# Altium PCB MainPCB.PcbDoc
Units mil, origin at the board's own origin, x right, y up, seen from the top; angles counter-clockwise.
Board outline 4940.02 x 2690.03 mil, 2 copper layers (Top Layer, Bottom Layer); 43 components, 48 nets, 197 pads, 3 vias.
Unrouted connection lines stored in the file: 1.
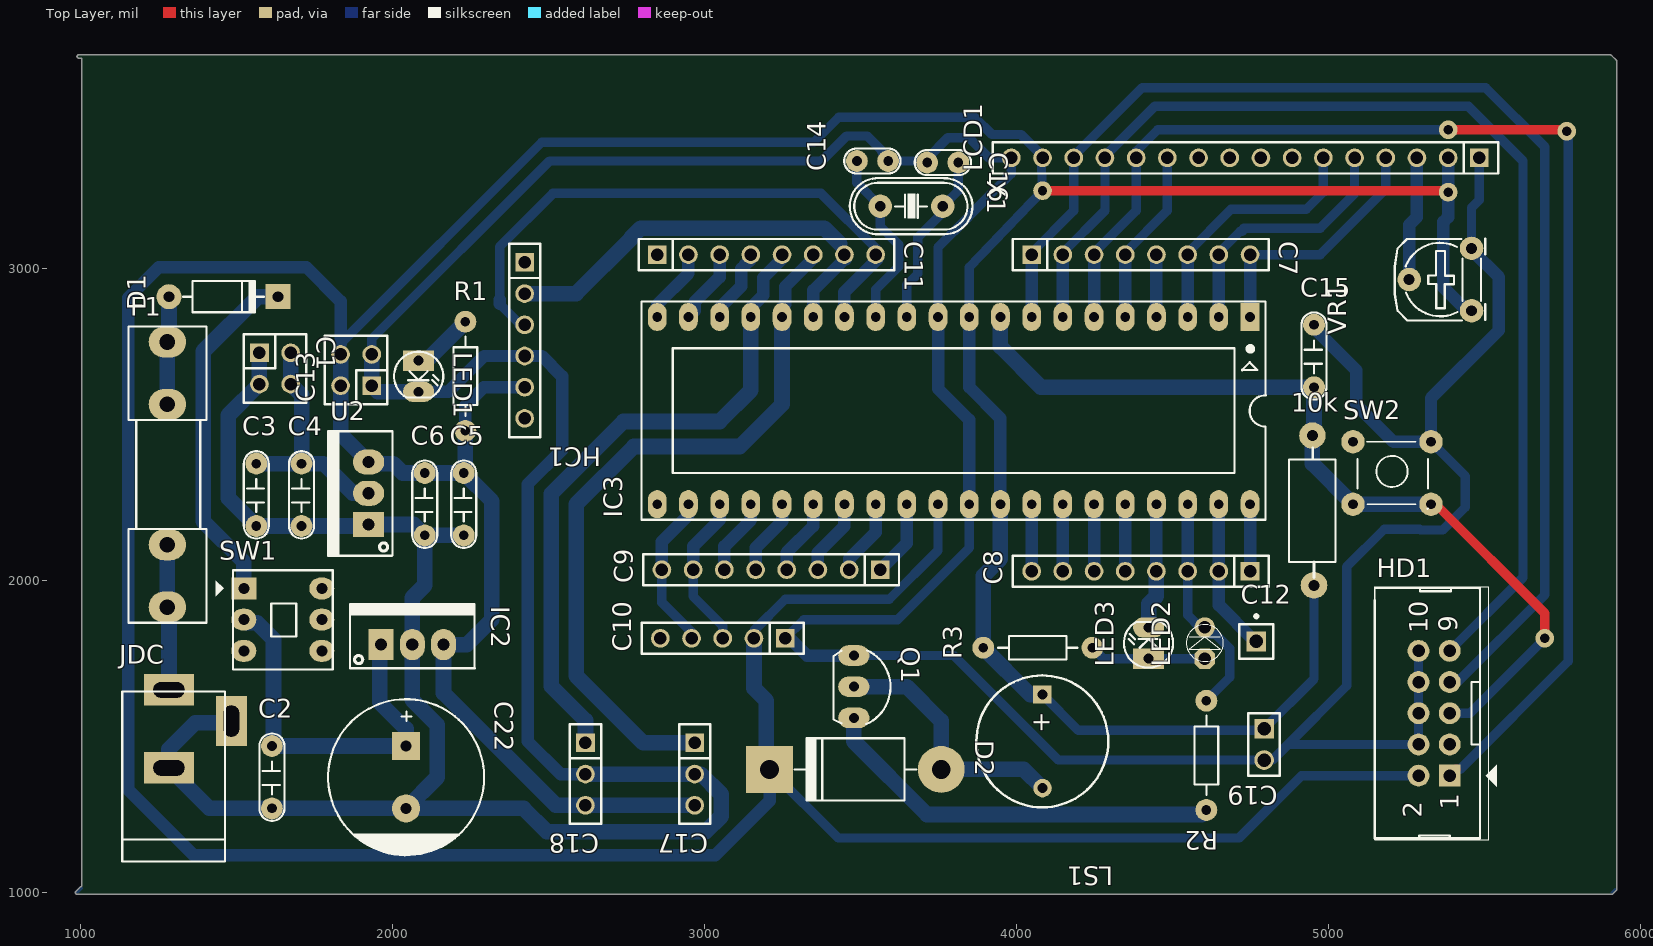
[diagram p0: Top Layer view]
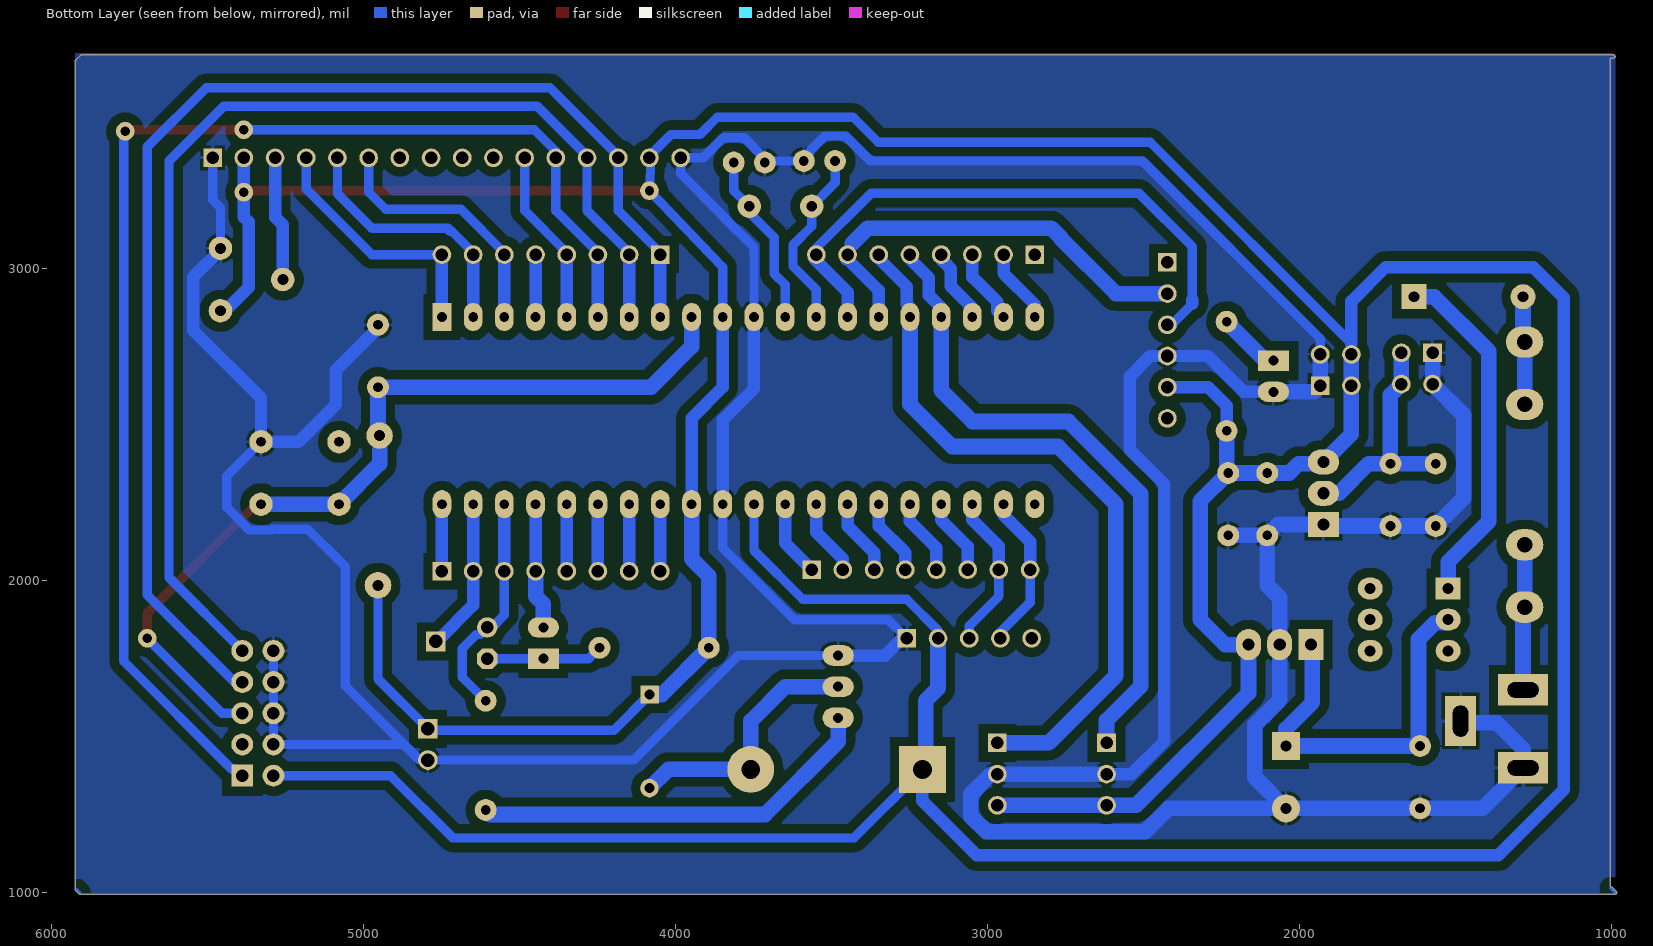
[diagram p1: Bottom Layer view, seen from below]
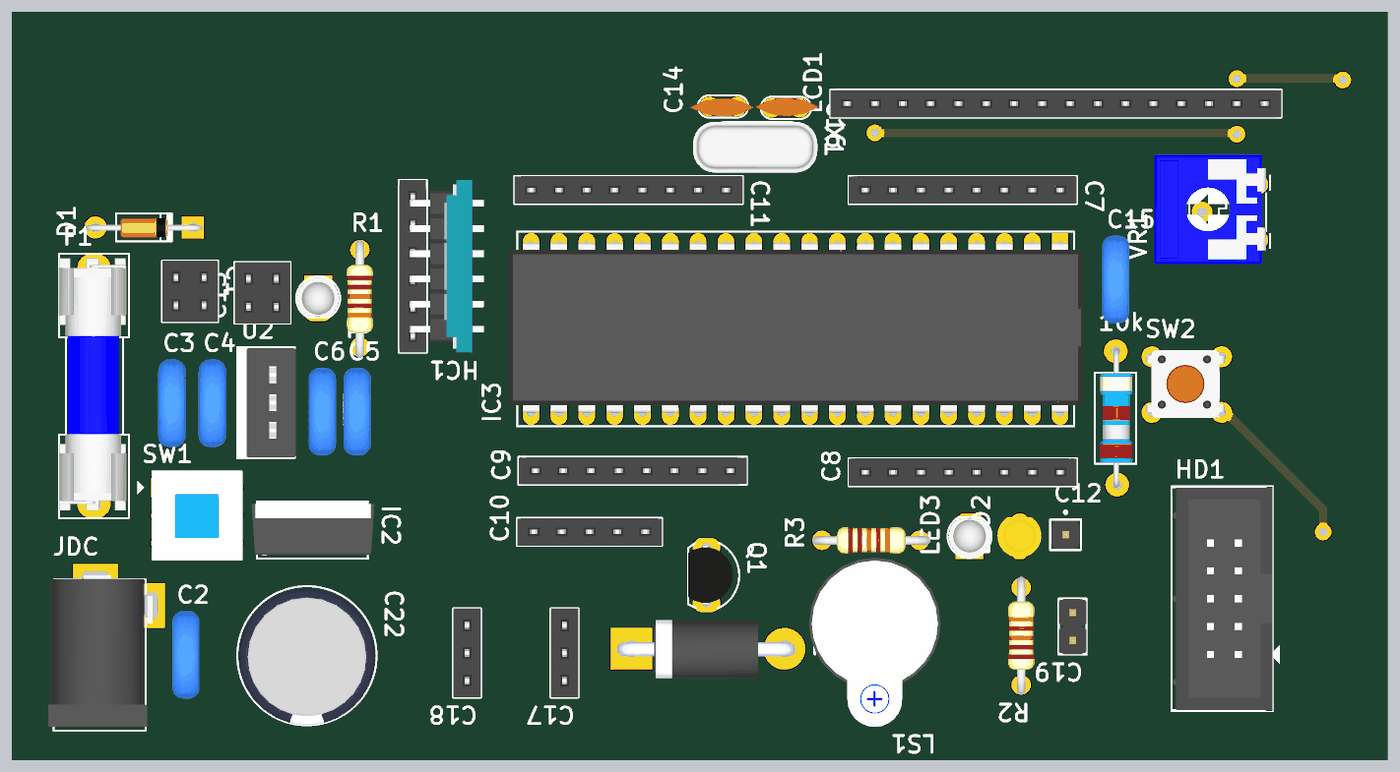
[diagram p2: 3D render of the assembled board from above, using the file's embedded part models]

## Layer stack, top to bottom
Top Solder: solder mask 0.4, Solder Resist, Dk 3.5
Top Layer: signal copper 1.4
Dielectric 1: dielectric 12.6, FR-4, Dk 4.8
Bottom Layer: signal copper 1.4
Bottom Solder: solder mask 0.4, Solder Resist, Dk 3.5

## Board outline
990,994.99 cw(c990,1000) 986.47,1003.56 986.45,1003.55 1001.45,1018.55 cw(c1005,1015) 1004.99,1020.01 1004.99,3674.99 995,3674.99 cw(c995,3680) 995,3685.01 5905,3685.01 cw(c5905,3680) 5908.56,3683.53 5908.55,3683.55 5923.55,3668.55 5923.53,3668.56 cw(c5920,3665) 5925.02,3665 5925.02,1010 cw(c5920,1010) 5923.53,1006.44 5923.55,1006.45 5913.55,996.45 5913.56,996.47 cw(c5910,1000) 5910,994.99

## Design rules (kind name [scope] priority, off if disabled: settings)
Clearance [All] p1: gap=30
PlaneConnect [All] p1: planeconnectstyle=Relief reliefexpansion=30 reliefentries=4 reliefconductorwidth=30 reliefairgap=30
PolygonConnect [All] p1: connectstyle=Relief reliefconductorwidth=10 reliefentries=4 polygonreliefangle="90 Angle" airgapwidth=10
RoutingCorners [All] p1: cornerstyle=45-Degree minsetback=30 maxsetback=90
RoutingVias [All] p1: holewidth=30 width=60 viastyle="Through Hole" minholewidth=30 minwidth=60 maxholewidth=40 maxwidth=70
SolderMaskExpansion [All] p1: expansion=4
Width [All] p1: maxlimit=50 minlimit=30 preferedwidth=40
28 further rules are at their usual default settings.

## Classes and differential pairs
component class Test: 10k C1 C3 C4 C5 C6 C7 C8 C9 C10 C11 C12 C13 C14 C15 C16 C17 C18 C19 C22 D1 D2 F1 HC1 HD1 IC2 IC3 JDC LED1 LED2 LED3 LS1 Q1 R1 R2 R3 SW1 SW2 U2 X1

## Components (designator, comment, footprint, x,y, rotation, side; value= is the part's Value field where it differs from the comment)
10k "Res" RES-1/2W 4950,2205 r90 top
C1 "JP2x2" JP2-C2T 1625,2680 r270 top
C2 "104" CN2 1615,1270 r90 top
C3 "106" CN2 1565,2175 r90 top
C4 "104" CN2 1710,2175 r90 top
C5 "104" CN2 2230,2145 r90 top
C6 "106" CN2 2105,2145 r90 top
C7 "JP8" JP8-C1T 4050,3045 r0 top
C8 "JP8" JP8-C1T 4750,2030 r180 top
C9 "JP8" JP8-C1T 3565,2035 r180 top
C10 "JP5" JP5-C1T 3260,1815 r180 top
C11 "JP8" JP8-C1T 2850,3045 r0 top
C12 "JP1" JP1-D1T 4770,1805 r0 top
C13 "JP2x2" JP2-C2T 1885,2675 r90 top
C14 "22pF" CN1 3590,3345 r180 top
C15 "104" CN2 4955,2620 r90 top
C16 "22pF" CN1 3715,3340 r0 top
C17 "JP3" JP3-C1T 2970,1480 r270 top
C18 "JP3" JP3-C1T 2620,1480 r270 top
C19 "JP2" JP2-D1T 4795,1525 r270 top
C22 "Cap Pol3" CP2/5 2045,1470 r270 top
D1 "1N4007" D1A 1285,2910 r180 top
D2 "1N5819" D5A 3210,1395 r0 top
F1 "F1A" Fuse 1280,2340 r90 top
HC1 "HC06" HC06 2425,2775 r270 top
HD1 "IDC 5x2" IDC10 5335,1575 r90 top
IC2 "LM7805" QTO-220 1965,1795 r0 top
IC3 "ATMEL 16L" DIP40/W0.6 4750,2845 r180 top
JDC "Jac DC" DC-IN 1385,1525 r90 top
LCD1 "LCD 16x2A" JP16-C1T 5485,3355 r180 top
LED1 "LED" LED-3 2085,2705 r270 top
LED2 "LED" LED-3MM-YELLOW 4605,1750 r90 top
LED3 "LED" LED-3 4425,1750 r90 top
LS1 "Speaker" SPEAKER 4084.5,1635 r270 top
Q1 "C1815" QTO-92 3480,1660 r270 top
R1 "1k" R1/4W 2235,2480 r90 top
R2 "1k" R1/4W 4610,1615 r270 top
R3 "1k" R1/4W 4245,1785 r180 top
SW1 "SW6S" SW6 1525,1975 r0 top
SW2 "SW" SW2-DIP 5080,2445 r0 top
U2 "LM1117-3.3V" TO220-123 1925,2180 r90 top
VR1 "10K" VR 5460,2865 r90 top
X1 "16Mhz" XT2 3665,3200 r0 top

## Footprints (in the part's own frame and the unit in brackets; to place one, negate y for a bottom-side part, rotate by r counter-clockwise, add the part's x,y. Pads: shape width x height; smd on the part's side, far side on the other; paste and mask are expansions set on the pad)
CN1 [mil]
  round 70 hole 31: 1(0,0) 2(100,0)
  silkscreen extent -40,-40 141,40, body extent -60,-30 170,37, height 265
CN2 [mil]
  round 70 hole 31: 1(0,0) 2(200,0)
  silkscreen extent -40,-40 240,40, body extent -54,-44 260,55, height 407
CP2/5 [mil] "Tu hoa 1000uF/25V,50V"
  rect 90x90 hole 35: 1(0,0)
  round 90 hole 35: 2(200,0)
  silkscreen extent -150,-250 350,250, body extent -142,-246 350,246, height 984
D1A [mil] "Diode 1A, W 100mil, L 350mil"
  round 80 hole 35: 1(0,0)
  rect 80x80 hole 35: 2(-350,0)
  silkscreen extent -305,-50 -45,50, body extent -386,-33 34,36, height 84
D5A [mil] "Diode 5A, W 200mil, L 550mil"
  round 150 hole 60: 1(550,0)
  rect 150x150 hole 60: 2(0,0)
  silkscreen extent 80,-100 470,100, body extent -52,-106 590,103, height 254
DC-IN [mil] "Jac DC input"
  rect 100x160 hole 50 slot 100 at 90 deg: 1(125,100) 2(-125,100)
  rect 160x100 hole 50 slot 100 at 0 deg: 3(25,-100)
  silkscreen extent -425,-80 120,250, body extent -410,-105 134,269, height 434
DIP40/W0.6 [mil] "40 PIN, W 600mil, Pin to pin 100mil"
  rect 60x90 hole 31: 1(0,0)
  oval 60x90 hole 31: 2(100,0) 3(200,0) 4(300,0) 5(400,0) 6(500,0) 7(600,0) 8(700,0) 9(800,0) 10(900,0) 11(1000,0) 12(1100,0) 13(1200,0) 14(1300,0) 15(1400,0) 16(1500,0) 17(1600,0) 18(1700,0) 19(1800,0) 20(1900,0) 21(1900,600) 22(1800,600) 23(1700,600) 24(1600,600) 25(1500,600) 26(1400,600) 27(1300,600) 28(1200,600) 29(1100,600) 30(1000,600) 31(900,600) 32(800,600) 33(700,600) 34(600,600) 35(500,600) 36(400,600) 37(300,600) 38(200,600) 39(100,600) 40(0,600)
  silkscreen extent -50,-50 1950,650, body extent -82,-10 1982,600, height 224
Fuse [mil] "De Fuse"
  oval 100x120 hole 50: 1(-425,0) 1(-225,0) 2(225,0) 2(425,0)
  silkscreen extent -475,-125 475,125, body extent -448,-117 459,127, height 378
HC06 [mm]
  rect 1.52x1.52 hole 1.02: 1(-6.223,0)
  round 1.52 hole 1.02: 2(-3.683,0) 3(-1.143,0) 4(1.397,0) 5(3.937,0) 6(6.477,0)
  silkscreen extent -7.74,-1.27 8,1.27, body extent -7.74,-1.25 8,6.48, height 46
IDC10 [mil]
  rect 70x70 hole 40: 1(-200,-55)
  round 70 hole 40: 2(-200,45) 3(-100,-55) 4(-100,45) 5(0,-55) 6(0,45) 7(100,-55) 8(100,45) 9(200,-55) 10(200,45)
  silkscreen extent -405,-205 405,186, body extent -400,-178 400,180, height 366
JP1-D1T [mm] "1pins, 1 row, straight, gold plating"
  rect 1.6x1.6 hole 1.1: 1(0,0)
  silkscreen extent -1.4,-1.4 1.4,2.17, body extent -1.27,-1.27 1.27,1.27, height 8.54
JP2-C2T [mm] "4 pins, dual row, straight, gold plating"
  rect 1.52x1.52 hole 1.02: 1(-1.27,-1.27)
  round 1.52 hole 1.02: 2(1.27,-1.27) 3(1.27,1.27) 4(-1.27,1.27)
  silkscreen extent -2.79,-2.54 2.79,2.54, body extent -2.79,-2.54 2.79,2.54, height 8.51
JP2-D1T [mm] "2 pins, 1 row, straight, gold plating"
  rect 1.6x1.6 hole 1.1: 1(0,0)
  round 1.6 hole 1.1: 2(2.54,0)
  silkscreen extent -1.27,-1.27 3.81,1.27, body extent -1.27,-1.27 3.81,1.27, height 8.54
JP3-C1T [mm] "3 row, straight, gold plating"
  rect 1.52x1.52 hole 1.02: 1(0,0)
  round 1.52 hole 1.02: 2(2.54,0) 3(5.08,0)
  silkscreen extent -1.52,-1.27 6.6,1.27, body extent -1.52,-1.25 6.6,1.25, height 8.51
JP5-C1T [mm] "5 row, straight, gold plating"
  rect 1.52x1.52 hole 1.02: 1(0,0)
  round 1.52 hole 1.02: 2(2.54,0) 3(5.08,0) 4(7.62,0) 5(10.16,0)
  silkscreen extent -1.52,-1.27 11.68,1.27, body extent -1.52,-1.25 11.68,1.25, height 8.51
JP8-C1T [mm] "8 row, straight, gold plating"
  rect 1.52x1.52 hole 1.02: 1(0,0)
  round 1.52 hole 1.02: 2(2.54,0) 3(5.08,0) 4(7.62,0) 5(10.16,0) 6(12.7,0) 7(15.24,0) 8(17.78,0)
  silkscreen extent -1.52,-1.27 19.3,1.27, body extent -1.52,-1.25 19.3,1.25, height 8.51
JP16-C1T [mm] "16 row, straight, gold plating"
  rect 1.52x1.52 hole 1.02: 1(0,0)
  round 1.52 hole 1.02: 2(2.54,0) 3(5.08,0) 4(7.62,0) 5(10.16,0) 6(12.7,0) 7(15.24,0) 8(17.78,0) 9(20.32,0) 10(22.86,0) 11(25.4,0) 12(27.94,0) 13(30.48,0) 14(33.02,0) 15(35.56,0) 16(38.1,0)
  silkscreen extent -1.52,-1.27 39.62,1.27, body extent -1.52,-1.25 39.62,1.25, height 8.51
LED-3 [mil] "LED 2 PIN, 3ly Only colour"
  rect 65x100 hole 32: 1(0,0)
  oval 65x100 hole 32: 2(100,0)
  silkscreen extent -29,-78 118,79, body extent -25,-75 113,75, height 217
LED-3MM-YELLOW [mil]
  oct 65x65 hole 40: 1(0,0)
  round 65 hole 40: 2(100,0)
  silkscreen extent -9,-59 109,59, body extent -27,-77 117,80, height 181
QTO-92 [mil] "TO-92"
  oval 66x100 hole 32: 1(-100,0) 2(0,0) 3(100,0)
  silkscreen extent -117,-65 120,118, body extent -109,-66 109,95, height 245
QTO-220 [mil] "TO-220 - 1-2-3"
  rect 80x100 hole 39: 1(0,0)
  oval 80x100 hole 39: 2(100,0) 3(200,0)
  silkscreen extent -100,-76 300,130, body extent -119,-64 322,121, height 755
R1/4W [mil] "R 1/4W, 2 Pin, 350mil"
  round 70 hole 31: 1(0,0) 2(350,0)
  silkscreen extent 48,-38 302,38, body extent -40,-47 386,47, height 111
RES-1/2W [mil]
  round 85 hole 35: 1(-220,-5) 2(260,0)
  silkscreen extent -195,-74 221,75, body extent -230,-60 270,56, height 121
SPEAKER [mm]
  rect 1.5x1.5 hole 0.8: 1(0,0)
  round 1.5 hole 0.8: 2(7.62,0.013)
  silkscreen extent -1.55,-5.38 9.18,5.36, body extent -2.22,-6 13.24,6, height 4.5
SW2-DIP [mil] "SW button 4pin, 250 x250 mil"
  round 75 hole 31: 1(0,0) 2(0,-200) 3(250,-200) 4(250,0)
  silkscreen extent 15,-215 240,0, body extent -36,-220 276,24, height 276
SW6 [mil] "SW DTDP - 6Pin 260x300x300 mil"
  rect 80x70 hole 35: 1(0,0)
  oval 80x70 hole 35: 2(0,-100) 3(0,-200) 4(250,-200) 5(250,-100) 6(250,0)
  silkscreen extent -90,-260 285,58, body extent -33,-259 281,55, height 532
TO220-123 [mil] "TO-220 - 1-2-3"
  rect 80x100 hole 39: 1(0,0)
  oval 80x100 hole 39: 2(100,0) 3(200,0)
  silkscreen extent -100,-76 300,130, body extent -95,-80 295,97, height 323
VR [mil] "Resistor Variable"
  round 75 hole 35: 1(0,0) 2(100,200) 3(200,0)
  silkscreen extent -31,-44 231,246, body extent -87,-30 307,372, height 165
XT2 [mil] "Footpin for Crystal 2 pin"
  round 75 hole 34: 1(-100,0) 2(100,0)
  silkscreen extent -198,-90 195,90, body extent -233,-93 213,90, height 138

## Part data
C1 C13: "WR-PHD 2.54 mm Dual Socket Header"
C2 C3 C4 C5 C6 C15: library part CN2, "Cap np 104 => 105pF"
C7 C8 C9 C10 C11 C12 C17 C18 C19: "WR-PHD 2.54 mm Angled Socket Header"
C14 C16: library part CN1, "Cap np  1pF - 472pF"
C22: "Polarized Capacitor (Surface Mount)"
D1: library part D1A, "Diode 1A"
D2: library part D5A, "Diode 5A"
F1: library part Fuse, "Fuse"
HD1: library part "IDC 5X2"
IC2: library part LM78xx, "On ap +, from + 5 to + 24VDC"
IC3: library part Atmega16L, "8-Bit AVR Microcontroller with 16K Bytes of In-System Programmable Flash Memory"
JDC: library part DCIN, "Jac DC input"
LCD1: library part LCD16x2A, "LCD dipslay 16 char, 2 line"
LED1 LED2 LED3: "LED Single colour Green and Red"
LS1: "Loudspeaker"
Q1: "NPN 600mW, ECB"
R1 R2 R3: library part R1/4W, "Resistor 1/4W"
SW1: "SW-DTDP - 6 Pin"
SW2: library part SW4, "Switch button 4 pin"
U2: library part LM1117, "800mA Low-Dropout Linear Regulator"
VR1: library part VR, "Var Resistor"
X1: library part XT2, "Crystal For all Crystal 2pin."

## Free pads (board coordinates)
  round 60 hole 30: 3(4085,3250) 4(5385,3245)

## Via types
v1: diameter 60, hole 30, Top Layer to Bottom Layer, 3 vias

## Nets (pads, with @x,y where several pads share a name; then routed paths per layer and width w, separated by ;. In a path a pad name is that pad's centre, name@x,y a point inside that pad or via, vN(x,y) a via of type N, cw(c..) or ccw(c..) an arc to the next point about the centre after c; other vN are vias at no path point)
3.3V: C1.3 C1.4 C3.2 C4.2 U2.2 | length 768.8
  Bottom Layer w50: C3.2 C4.2 ; C1.4 C1.3 1710,2595 C4.2 ; U2.2 1875,2280 1780,2375 C4.2
DS: C10.5
GND: C1.1 C1.2 C2.1 C3.1 C4.1 C5.1 C6.1 C10.1 C13.1 C13.2 C14.1 C15.2 C16.1 C17.2 C18.2 C19.2 C22.2 HC1.4 HD1.4 HD1.6 HD1.8 HD1.10 IC2.2 IC3.11 IC3.31 JDC.2 JDC.3 LCD1.1 LCD1.16 LED1.2 Q1.1 SW2.4 U2.1 VR1.3 | length 17348.5
  Bottom Layer w30: C13.2 1935,2775 2505,3345 3376.86,3345 3456.86,3425 3523.14,3425 3570,3378.14 3570,3375 C14.1@3600,3345 ; C10.1 3320,1875 3620,1875 3850,2105 IC3.31 ; Q1.1 3800,1760 4135,1425 C19.2 4821.63,1425 4871.63,1475 ; C14.1 C14.1@3600,3345 ; IC3.11 3750,3068.33 3847.5,3165.83 3847.5,3167.21 3985,3304.71 LCD1.16 3913.14,3355 3848.14,3420 3781.86,3420 3716.86,3355 3730,3355 C16.1 3710,3345 C14.1@3600,3345 ; HD1.10 HD1.8 HD1.6 HD1.4 4871.63,1475 ; SW2.4 5440,2335 5440,2235 5367.5,2162.5 5295.83,2162.5 5293.33,2165 5180,2165 5060,2045 5060,1663.37 4871.63,1475 ; VR1.3@5460,3060 VR1.3 5460,3195 5485,3220 LCD1.1
  Bottom Layer w40: LED1.2 2180,2605 2295,2720 HC1.4 2480,2720 2545,2655 2545,2419.2 2435,2309.2 2435,1485 2540,1380 C18.2 ; C10.1 3275,1815 3330,1760 Q1.1 ; IC3.11 3750,2615 3850,2515 IC3.31 ; C15.2 4955,2810 5090,2675 5090,2565 5210,2445 SW2.4 5330,2585 5547.5,2802.5 5547.5,2972.5 VR1.3@5460,3060
  Bottom Layer w50: JDC.3 1480,1545 1370,1545 1285,1460 JDC.2 1415,1270 C2.1 C22.2 ; C1.1 C1.2 1475,2530 1475,2265 C3.1 C4.1 1920,2175 U2.1 2070,2180 C6.1 ; C13.2 C13.1 1955,2605 LED1.2 ; C5.1 C6.1 ; C18.2 C17.2 2990.1,1380 3054.92,1315.18 3054.92,1244.82 3005.18,1195.08 2496.78,1195.08 2421.86,1270 C22.2 ; C22.2 2145,1370 2145,1537.78 2065,1617.78 IC2.2 2065,1945 2105,1985 C6.1
MISO: C7.2 HD1.9 IC3.7 LCD1.13 | length 3717.6
  Bottom Layer w30: C7.2 4150,3050.95 4285,3185.95 LCD1.13 4285,3360.95 4444.05,3520 5450,3520 5625,3345 5625,2010 HD1.9
  Bottom Layer w40: IC3.7 C7.2
MOSI: C7.3 HD1.1 IC3.6 LCD1.12 | length 4258.1
  Top Layer w30: v1(5385,3445) 5760,3445 v1(5765,3440) ; HD1.1 HD1.1@5410,1395
  Bottom Layer w30: C7.3 4250,3050.95 4385,3185.95 LCD1.12 4385,3376.1 4453.9,3445 v1(5385,3445) ; HD1.1 5410,1395 5423.14,1395 5770,1741.86 5770,3435 v1(5765,3440)
  Bottom Layer w40: IC3.6 C7.3
NetC2_2: C2.2 C22.1 IC2.1 SW1.2 | length 1255.5
  Bottom Layer w50: SW1.2 1535,1865 1567.28,1865 1620,1812.28 C2.2@1620,1470 ; C2.2 C2.2@1620,1470 ; IC2.1 1960,1790 1960,1609.64 2045,1524.64 C22.1 C2.2@1620,1470
NetD1_1: D1.1 F1.2 | length 347.1
  Bottom Layer w50: F1.2@1280,2565 1280,2765 1285,2770 D1.1
NetD1_2: D1.2 SW1.1 | length 1126.3
  Bottom Layer w50: SW1.1 1525,2060 1395,2190 1395,2735 1570,2910 D1.2
NetD2_1: D2.1 LS1.2 Q1.2 | length 830.4
  Bottom Layer w50: Q1.2 3650,1660 3760,1550 D2.1 4025,1395 LS1.2
NetF1_1: F1.1 JDC.1 | length 467.1
  Bottom Layer w50: F1.1@1280,2115 1280,1915 1285,1910 JDC.1
NetLCD1_3: LCD1.3 VR1.2 | length 405.4
  Bottom Layer w40: VR1.2@5260,2960 VR1.2 5260,3140 5285,3165 LCD1.3
NetLED1_1: LED1.1 R1.2 | length 201.8
  Bottom Layer w50: LED1.1 2110,2705 R1.2
NetLED2_1: LED2.1 LED3.1 R3.1 | length 374.5
  Bottom Layer w30: R3.1 4280,1750 LED3.1 LED2.1
NetQ1_3: Q1.3 R2.2 | length 1308.2
  Bottom Layer w50: Q1.3 3480,1485 3714.53,1250.47 4595.47,1250.47 R2.2
PA0: C8.1 IC3.40 | length 215
  Bottom Layer w40: C8.1 IC3.40
PA1: C8.2 C12.1 IC3.39 | length 481.3
  Bottom Layer w40: IC3.39 C8.2 4650,1921.67 C12.1@4761.67,1810
PA2: C8.3 IC3.38 LED2.2 R2.1 | length 733
  Bottom Layer w30: C8.3 4550,1890 4590,1850 LED2.2 4627.5,1827.5 4639.89,1827.5 4685,1782.39 4685,1690 R2.1
  Bottom Layer w40: C8.3 IC3.38
PA3: C8.4 IC3.37 LED3.2 | length 405.4
  Bottom Layer w40: C8.4 IC3.37
  Bottom Layer w50: LED3.2 4425,1925 4450,1950 C8.4
PA4: C8.5 IC3.36 | length 215
  Bottom Layer w40: C8.5 IC3.36
PA5: C8.6 IC3.35 | length 215
  Bottom Layer w40: C8.6 IC3.35
PA6: C8.7 IC3.34 | length 215
  Bottom Layer w40: C8.7 IC3.34
PA7: C8.8 IC3.33 | length 215
  Bottom Layer w40: C8.8 IC3.33
PB0: C7.8 IC3.1 LCD1.4 | length 822
  Bottom Layer w30: C7.8 4975,3045 5185,3255 LCD1.4
  Bottom Layer w40: IC3.1 C7.8
PB1: C7.7 IC3.2 LCD1.5 | length 837.3
  Bottom Layer w30: C7.7 4650,3050.95 4718.97,3119.92 4724.92,3119.92 4730,3125 4730,3130 4975.15,3130 5085,3239.85 LCD1.5
  Bottom Layer w40: IC3.2 C7.7
PB2: C7.6 IC3.3 LCD1.6 | length 831.3
  Bottom Layer w30: C7.6 4550,3050.95 4689.05,3190 4930,3190 4985,3245 LCD1.6
  Bottom Layer w40: IC3.3 C7.6
PB3: C7.5 IC3.4 | length 200
  Bottom Layer w40: IC3.4 C7.5
PB4: C7.4 IC3.5 LCD1.11 | length 565.9
  Bottom Layer w30: C7.4 4350,3050.95 4485,3185.95 LCD1.11
  Bottom Layer w40: IC3.5 C7.4
PB7: C7.1 HD1.7 IC3.8 LCD1.14 | length 4107.3
  Bottom Layer w30: C7.1 4050,3050.95 4185,3185.95 LCD1.14 4185,3360.95 4404.05,3580 5505,3580 5695,3390 5695,1955 5415,1675 HD1.7
  Bottom Layer w40: IC3.8 C7.1
PC0: C9.8 C10.4 IC3.22 | length 504.6
  Bottom Layer w30: C9.8 2865,1930 2960,1835 C10.4
  Bottom Layer w40: C9.8 2865,2125 2950,2210 IC3.22
PC1: C9.7 C10.3 IC3.23 | length 504.6
  Bottom Layer w30: C9.7 2965,1950 3060,1855 C10.3
  Bottom Layer w40: C9.7 2965,2110 3050,2195 IC3.23
PC2: C9.6 IC3.24 | length 245.2
  Bottom Layer w40: C9.6 3065,2110 3150,2195 IC3.24
PC3: C9.5 IC3.25 | length 245.2
  Bottom Layer w40: C9.5 3165,2105 3250,2190 IC3.25
PC4: C9.4 IC3.26 | length 245.2
  Bottom Layer w40: C9.4 3265,2090 3350,2175 IC3.26
PC5: C9.3 IC3.27 | length 245.2
  Bottom Layer w40: C9.3 3365,2090 3450,2175 IC3.27
PC6: C9.2 IC3.28 | length 245.2
  Bottom Layer w40: C9.2 3465,2070 3550,2155 IC3.28
PC7: C9.1 IC3.29 | length 245.2
  Bottom Layer w40: C9.1 3650,2120 IC3.29
PD0: C11.8 HC1.3 IC3.14 | length 1904
  Bottom Layer w30: 2345,2900 2345,3070.55 2515.55,3241.1 3375,3241.1 3550,3066.1 C11.8 ; 2345.08,2886.9 HC1.3@2411.97,2820
  Bottom Layer w40: 2345,2900 2345.08,2899.92 2345.08,2886.9 ; HC1.3@2411.97,2820 HC1.3 ; IC3.14 3450,2925 3555,3030 C11.8@3555,3045
PD1: C11.7 HC1.2 IC3.15 | length 1360.4
  Bottom Layer w40: IC3.15 3350,2930.06 C11.7@3450,3030.06 ; C11.7@3455,3030.06 C11.7@3455,3045
  Bottom Layer w50: HC1.2 2590,2920 2765.08,3095.08 2765.08,3097.7 2797.3,3129.92 3385.18,3129.92 3434.92,3080.18
PD2: C11.6 C17.1 IC3.16 | length 2333
  Bottom Layer w40: IC3.16 3250,2876.15 3260,2886.15 3260,2941.97 3350,3031.97 C11.6
  Bottom Layer w50: C17.1 2805,1480 2590,1695 2590,2245 2775,2430 3115,2430 3250,2565 IC3.16
PD3: C11.5 C18.1 IC3.17 | length 2097.6
  Bottom Layer w40: IC3.17 3150,2875.15 3190,2915.15 3190,2970.97 3250,3030.97 C11.5
  Bottom Layer w50: C18.1 2620,1551.86 2510,1661.86 2510,2278.14 2741.86,2510 3050,2510 3150,2610 IC3.17
PD4: C11.4 IC3.18 | length 243.4
  Bottom Layer w40: IC3.18 3050,2874.14 3120,2944.14 3120,2999.96 3130.93,3010.89 3129.92,3011.9 3131.93,3011.9 3150,3029.96 C11.4
PD5: C11.3 IC3.19 | length 241.4
  Bottom Layer w40: IC3.19 2970,2865 2970,2893.14 3050,2973.14 C11.3
PD6: C11.2 IC3.20 | length 241.4
  Bottom Layer w40: IC3.20 2850,2884.92 2950,2984.92 C11.2
PD7: C11.1 IC3.21
RESET: 10k.2 C15.1 HD1.5 IC3.9 SW2.2 SW2.3 | length 2844.2
  Top Layer w30: SW2.3 5345,2245 5695,1895 v1(5695,1815) ; HD1.5 HD1.5@5405,1575
  Bottom Layer w30: HD1.5 5455,1575 v1(5695,1815)
  Bottom Layer w50: IC3.9 3950,2750 4080,2620 C15.1 4955,2470 10k.2 4950,2375 SW2.2 SW2.3
VCC: 10k.1 C5.2 C6.2 C10.2 C13.3 C13.4 C17.3 C18.3 C19.1 D2.2 HC1.5 HD1.2 IC2.3 IC3.10 IC3.30 IC3.32 LCD1.2 LCD1.15 LS1.1 pad.3 pad.4 R1.1 R3.2 U2.3 VR1.1 | length 19057.2
  Top Layer w30: pad.3 5380,3250 pad.4
  Bottom Layer w30: C13.3 1835,2759.85 2480.15,3405 3352.01,3405 3432.01,3485 3867.99,3485 3922.99,3430 4015.95,3430 4085,3360.95 4083.9,3360.75 4080,3360 4080.24,3354.78 pad.3 3850,3004.78 IC3.10 ; C10.2 3160,1840 3260,1940 3593.48,1940 3750,2096.52 IC3.30 ; D2.2 3430,1175 4715,1175 4915,1375 HD1.2 ; LS1.1 4199.5,1520 4790,1520 C19.1 4955,1685 10k.1
  Bottom Layer w40: 1835,2759.85 1835,2895 1725,3005 1252.72,3005 1155,2907.28 1155,1329.29 1364.21,1120.08 3036.24,1120.08 3210,1293.84 D2.2 ; R1.1 2235,2561.01 2293.99,2620 HC1.5 ; IC3.10 3850,2620 3950,2520 IC3.32 ; LCD1.2 pad.4 5385,3165 5370,3150 5370,2940 5450,2860 VR1.1@5460,2860
  Bottom Layer w50: C13.3 C13.4 1835,2470 U2.3 1930,2375 2004.35,2375 2034.35,2345 C6.2 C5.2 ; R1.1 2235,2350 C5.2 ; C17.3 C18.3 2525,1280 2165,1640 IC2.3 2240,1795 2320,1875 2320,2255 C5.2 ; C10.2 3160,1655 3200,1615 3200,1405 D2.2 ; IC3.32 3950,2070 3895,2015 R3.2 4045,1635 LS1.1
XTAL1: C14.2 IC3.13 X1.1 | length 586.9
  Bottom Layer w30: C14.2 3490,3275 X1.1 3565,3135.95 3624.92,3076.03 3624.92,3008 3550,2933.08 IC3.13
XTAL2: C16.2 IC3.12 X1.2 | length 577.5
  Bottom Layer w30: IC3.12@3660,2855 IC3.12 3650,2948.22 3684.92,2983.14 3684.92,3099.92 3765,3180 X1.2 3815,3250 C16.2
pads on no net: HC1.1 HC1.6 HD1.3 LCD1.7 LCD1.8 LCD1.9 LCD1.10 SW1.3 SW1.4 SW1.5 SW1.6 SW2.1
copper on no net: | length 35.4
  Bottom Layer w10: 990,1000 1005,1015 ; 5910,1000 5920,1010

## Polygon pours and split planes (outlines as drawn)
GND on Bottom Layer "GND_L02_P008" (solid, pour order 8): 1000,3690 5925,3690 5925,1000 5930,995 5925,1000 990,1000 990,3680 1000,3690

## Text inside footprints (layer, text, board x,y; h text height)
HD1: Top Overlay "1" at 5419.53,1265.75 h60 r90; Top Overlay "2" at 5300,1240 h60 r90; Top Overlay "9" at 5414,1836 h60 r90; Top Overlay "10" at 5319,1831 h60 r90
LS1: Top Overlay "+" at 4056.5,1579.5 h60 r270